# Altium PCB 04-11376.PcbDoc (part 1 of 3)
Units mm, origin at the board's own origin, x right, y up, seen from the top; angles counter-clockwise.
Board outline 23 x 31.8 mm, 4 copper layers (Top Layer, GND, Power, Bottom Layer), stack 1.312 mm thick; 75 components, 46 nets, 201 pads, 132 vias.
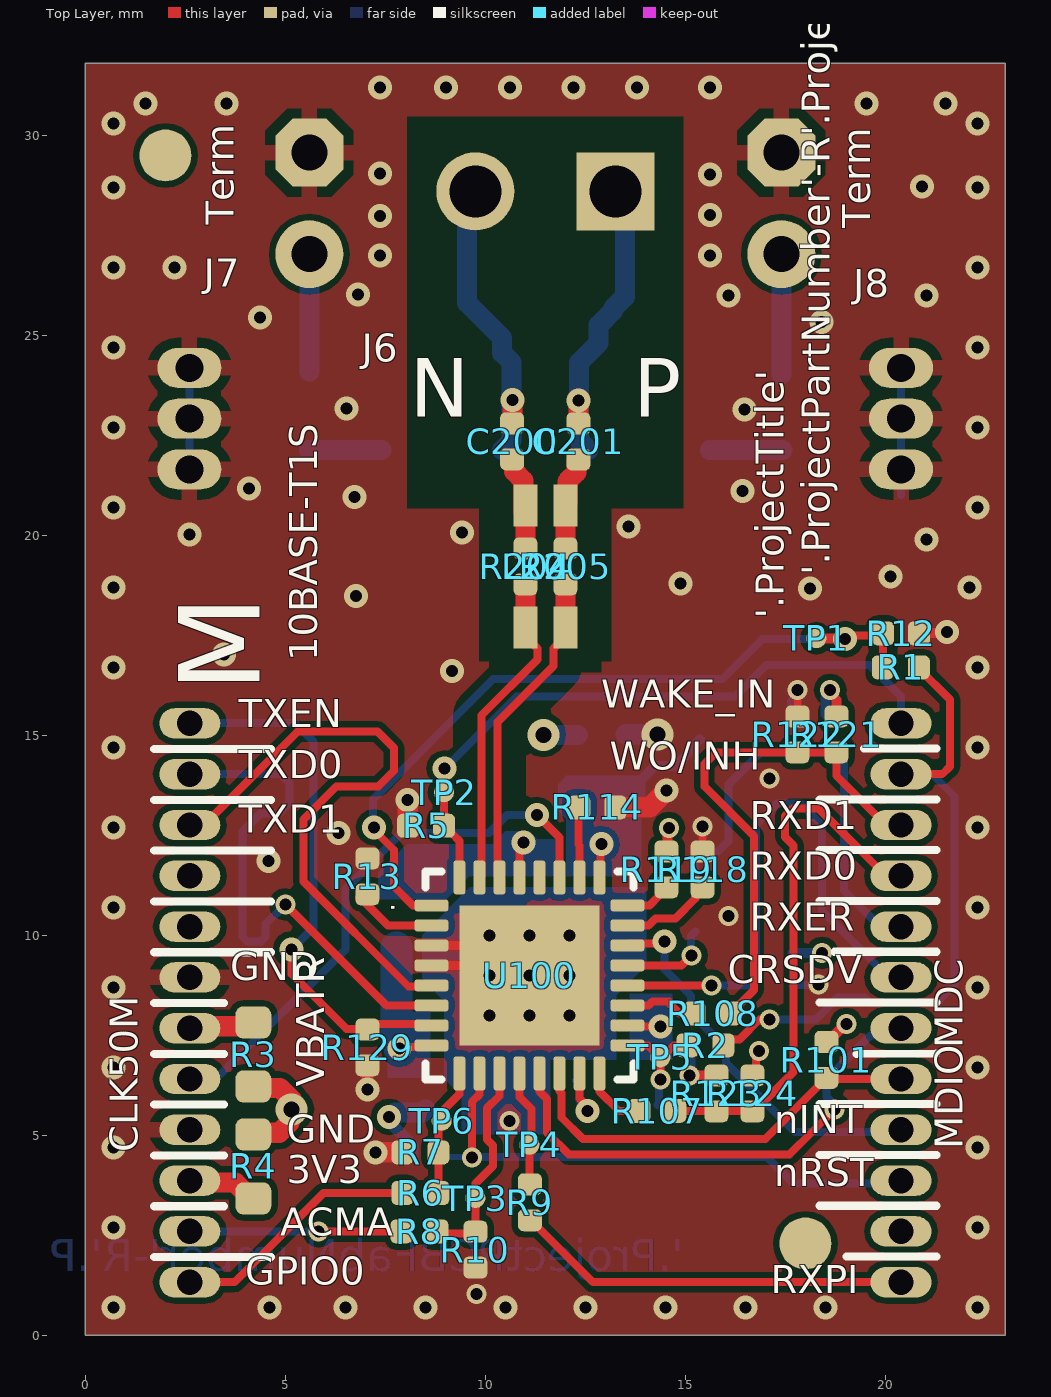
[diagram p0: Top Layer view]
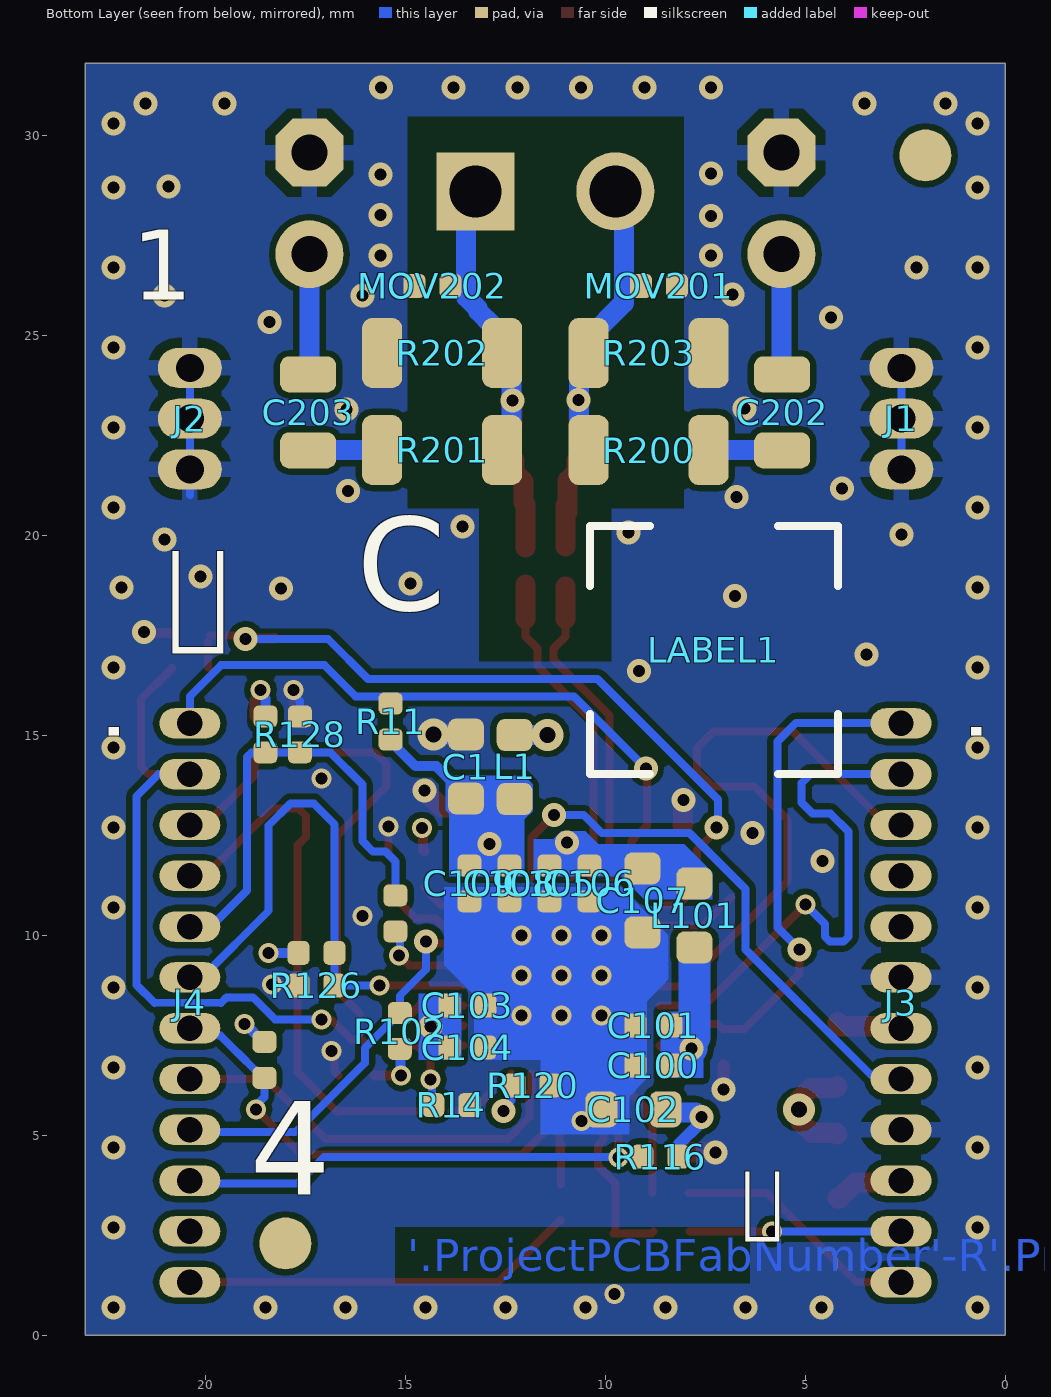
[diagram p1: Bottom Layer view, seen from below]
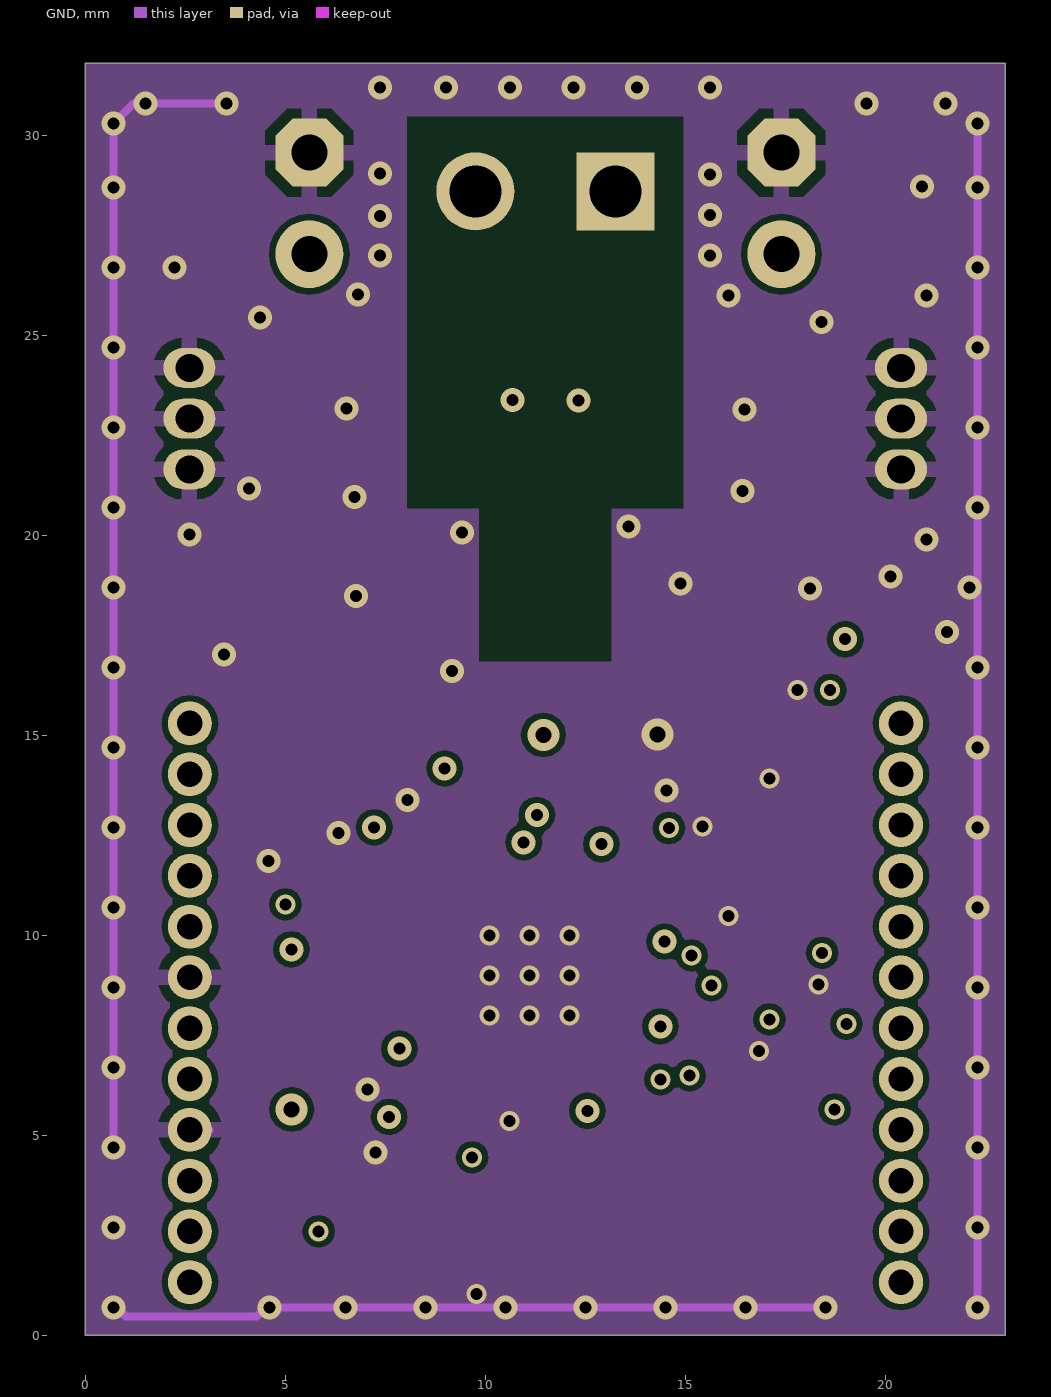
[diagram p2: GND]
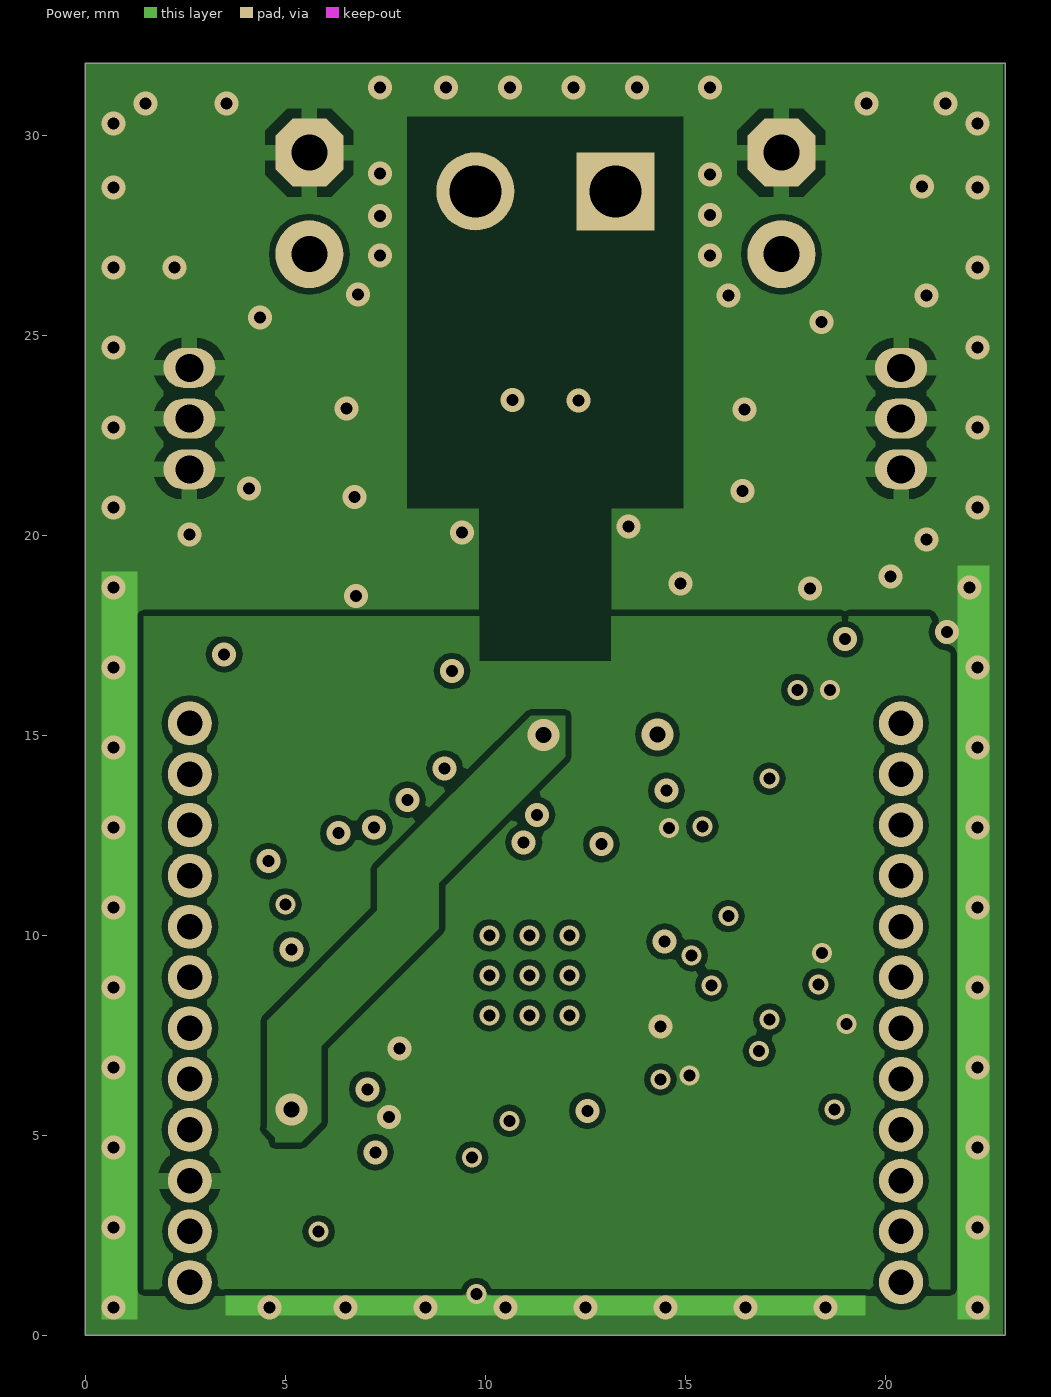
[diagram p3: Power]

## Layer stack, top to bottom
Top Layer: signal copper 0.018
Dielectric 1: prepreg 0.14, 2x1080, Dk 4.2
GND: signal copper 0.033
Dielectric 2: core 0.93, FR-4, Dk 4.2
Power: signal copper 0.033
Dielectric 3: prepreg 0.14, 2x1080, Dk 4.2
Bottom Layer: signal copper 0.018

## Board outline
0,0 0,31.8 23,31.8 23,0

## Design rules (kind name [scope] priority, off if disabled: settings)
BoardOutlineClearance [All] p1: gap=0 ignorepadtopadclearanceinfootprint=FALSE
Clearance "Text To Poly" [IsText vs IsRegion] p1 off: gap=-0.1 ignorepadtopadclearanceinfootprint=FALSE except(0: Arc-Hole Track-Hole SMDPad-Hole THPad-Hole Via-Hole Fill-Hole Poly-Hole Region-Hole Text-Hole)
Clearance "EMV 1mm" [InNetClass('EMV') vs (not InNetClass('EMV')) and (not OnLayer('Keep-Out Layer')       )] p2 off: gap=1 ignorepadtopadclearanceinfootprint=FALSE except(0: Arc-Hole Track-Hole SMDPad-Hole THPad-Hole Via-Hole Fill-Hole Poly-Hole Region-Hole Text-Hole)
Clearance "Switch zu Allem 1mm" [InNet('SWITCH') vs (IsRegion)] p3: gap=1 ignorepadtopadclearanceinfootprint=FALSE except(0: Arc-Hole Track-Hole SMDPad-Hole THPad-Hole Via-Hole Fill-Hole Poly-Hole Region-Hole Text-Hole)
Clearance "Diff to Polygon" [InDifferentialPairClass('All Differential Pairs') vs InPolygon] p4: gap=0.6 ignorepadtopadclearanceinfootprint=FALSE
Clearance "small Pads 0.2mm" [(IsTrack) or (InPadClass('All Pads')) vs HasFootprint('MSOP-8_P0.65_EP', 'VQFN-36_6x6_EP4.5x4.5')] p5: gap=0.2 ignorepadtopadclearanceinfootprint=FALSE except(0: Arc-Hole Track-Hole SMDPad-Hole THPad-Hole Via-Hole Fill-Hole Poly-Hole Region-Hole Text-Hole)
Clearance [All] p6: gap=0.15 ignorepadtopadclearanceinfootprint=FALSE except(0: Arc-Hole Track-Hole SMDPad-Hole THPad-Hole Via-Hole Fill-Hole Poly-Hole Region-Hole Text-Hole)
ComponentClearance "M1 J1 J2 J3 J4 J5 J6 J7 J8" [InComponent('M1','J1','J2','J3','J4','J5','J6','J7','J8') vs InComponent('M1','J1','J2','J3','J4','J5','J6','J7','J8')] p1: gap=-1 collisioncheckmode=3 verticalgap=0.254 showdistances=FALSE
ComponentClearance "D2 D3" [InComponent('D2','D3') vs InComponent('D2','D3')] p2: gap=-1 collisioncheckmode=3 verticalgap=0.254 showdistances=FALSE
ComponentClearance "C4 C12" [InComponent('C4','C12') vs InComponent('C4','C12')] p3: gap=-1 collisioncheckmode=3 verticalgap=0.254 showdistances=FALSE
ComponentClearance "C3 C8" [InComponent('C3','C8') vs InComponent('C3','C8')] p4: gap=-1 collisioncheckmode=3 verticalgap=0.254 showdistances=FALSE
ComponentClearance "D1 D11" [InComponent('D1','D11') vs InComponent('D1','D11')] p5: gap=-1 collisioncheckmode=3 verticalgap=0.254 showdistances=FALSE
ComponentClearance "D4 D10" [InComponent('D4','D10') vs InComponent('D4','D10')] p6: gap=-1 collisioncheckmode=3 verticalgap=0.254 showdistances=FALSE
ComponentClearance "C7 C8" [InComponent('C7','C8'     ) vs InComponent('C7','C8'  )] p7: gap=-1 collisioncheckmode=3 verticalgap=0.254 showdistances=FALSE
ComponentClearance "M1 CN200 CN201" [InComponent('M1','CN200','CN201') vs InComponent('M1','CN200','CN201')] p8: gap=-1 collisioncheckmode=3 verticalgap=0.254 showdistances=FALSE
ComponentClearance "M1 J200 J201" [InComponent('L200','R204','R205') vs InComponent('L200','R204','R205')] p9: gap=-1 collisioncheckmode=3 verticalgap=0.254 showdistances=FALSE
ComponentClearance [All] p10: gap=0.2 collisioncheckmode=3 verticalgap=0.2 showdistances=FALSE
DiffPairsRouting [All] p1: maxlimit=0.2 minlimit=0.2 mostfreqgap=0.2 toplayer_minwidth=0.2 toplayer_maxwidth=0.2 toplayer_prefwidth=0.2 midlayer1_minwidth=0.2 midlayer1_maxwidth=0.2 midlayer1_prefwidth=0.2 midlayer2_minwidth=0.2 midlayer2_maxwidth=0.2 midlayer2_prefwidth=0.2 bottomlayer_minwidth=0.2 bottomlayer_maxwidth=0.2 bottomlayer_prefwidth=0.2 maxuncoupledlength=12.7
FabricationTestPointUsage TestPointUsage [All] p1: valid=0 allowmultiple=FALSE
FabricationTestpoint Testpoint [All] p1: side=3 testpointundercomponent=TRUE minsize=1.016 maxsize=2.54 preferedsize=1.524 minholesize=0 maxholesize=1.016 preferedholesize=0.813 testpointgrid=0.025 allowsidetop=TRUE allowsidebottom=TRUE usegrid=TRUE gridtolerance=0
HoleSize [All] p1: absolutevalues=TRUE maxlimit=5 minlimit=0.3 maxpercent=80.000 minpercent=20.000
HoleToHoleClearance [All] p1: gap=0.3 allowstackedmicrovias=TRUE
MinimumSolderMaskSliver [All] p1 off: minsoldermaskwidth=0.17
PlaneClearance [All] p1: clearance=0.5
PlaneConnect [All] p1: planeconnectstyle=Relief reliefexpansion=0.5 reliefentries=4 reliefconductorwidth=0.3 reliefairgap=0.3
PolygonConnect PolygonConnect_0.7 [IsNamedPolygon('0.7mm') vs (InPadClass('All Pads'))] p1: connectstyle=Relief reliefconductorwidth=0.7 reliefentries=4 polygonreliefangle="90 Angle" airgapwidth=0.25
PolygonConnect PolygonConnect_full [All vs IsVia or IsSMTPin] p2: connectstyle=Direct reliefconductorwidth=0 reliefentries=4 polygonreliefangle="90 Angle" airgapwidth=0.254
PolygonConnect PolyConn3.2 [AsMM(HoleDiameter = 3.2)] p3: connectstyle=Direct reliefconductorwidth=0 reliefentries=4 polygonreliefangle="90 Angle" airgapwidth=0.254
PolygonConnect PolygonConnect_0.5 [IsNamedPolygon('0.5mm') vs (InPadClass('All Pads'))] p4: connectstyle=Relief reliefconductorwidth=0.5 reliefentries=4 polygonreliefangle="90 Angle" airgapwidth=0.25
PolygonConnect [All] p5: connectstyle=Relief reliefconductorwidth=0.4 reliefentries=4 polygonreliefangle="90 Angle" airgapwidth=0.25
RoutingVias [All] p1: holewidth=0.4 width=0.8 viastyle="Through Hole" minholewidth=0.3 minwidth=0.6 maxholewidth=1.6 maxwidth=2.5
SilkToSilkClearance [All] p1: silktosilkclearance=0.2
SilkToSolderMaskClearance SilkscreenOverComponentPads [IsPad] p1: minsilkscreentomaskgap=0.2 clearancetoexposedcopper=TRUE
SolderMaskExpansion [All] p1: expansion=0 istentingtop=FALSE
Width [All] p1: maxlimit=7 minlimit=0.15 preferedwidth=0.25 toplayer_minwidth=0.2 midlayer1_minwidth=0.2 midlayer2_minwidth=0.2 minimp=50.000000 maximp=50.000000 favimp=50.000000
19 further rules are at their usual default settings.

## Classes and differential pairs
net class Power: 3V3 VDDA VDDAU
net class "100 Ohm Diff": TRX_N TRX_P
component class "Phy Daughter Board Header": J1 J2 J3 J4 R1 R2 R3 R4
component class Mechanical: LABEL1 LABEL?
component class "LAN8670 Watson": C1 C100 C101 C102 C103 C104 C105 C106 C107 C108 C109 L1 L101 R5 R6 R7 R8 R9 R10 R11 R12 R13 R14 R100 R101 R102 R107 R108 R109 R114 R116 R118 R119 R120 R121 R122 R123 R124 R125 R126 R127 R128 R129 TP1 TP2 TP3 TP4 TP5 TP6 U100
component class BIN: C200 C201 C202 C203 J6 J7 J8 L200 MOV201 MOV202 R200 R201 R202 R203 R204 R205
differential pair TRX: +TRX_P -TRX_N

## Components (designator, comment, footprint, x,y, rotation, side; value= is the part's Value field where it differs from the comment)
C1 "Capacitor NP" CAP_C_0603 13.485,14.222 r270 bottom value=10uF
C100 "Capacitor NP" CAP_C_0402 8.8,6.75 r180 bottom value=10000pF
C101 "Capacitor NP" CAP_C_0402 8.8,7.75 r180 bottom value=0.1uF
C102 "Capacitor NP" CAP_C_0603 9.3,5.65 r180 bottom value=10uF
C103 "Capacitor NP" CAP_C_0402 13.45,8.25 r0 bottom value=10000pF
C104 "Capacitor NP" CAP_C_0402 13.45,7.2 r0 bottom value=0.1uF
C105 "Capacitor NP" CAP_C_0402 11.4,11.3 r90 bottom value=10000pF
C106 "Capacitor NP" CAP_C_0402 10.4,11.3 r90 bottom value=0.1uF
C107 "Capacitor NP" CAP_C_0603 9.075,10.875 r90 bottom value=10uF
C108 "Capacitor NP" CAP_C_0402 12.4,11.3 r90 bottom value=10000pF
C109 "Capacitor NP" CAP_C_0402 13.4,11.3 r90 bottom value=0.1uF
C200 "Capacitor NP" CAP_C_0402 10.668,22.352 r90 top value=0.1uF
C201 "Capacitor NP" CAP_C_0402 12.325,22.348 r90 top value=0.1uF
C202 "Capacitor NP" CAP_C_0805 5.581,23.076 r270 bottom value=0.22uF
C203 "Capacitor NP" CAP_C_0805 17.432,23.076 r270 bottom value=0.22uF
J1 "Header 1x3" HDR_M_1.27_1x3_TMS_103-02_L_S 2.6,22.92 r270 bottom
J2 "Header 1x3" HDR_M_1.27_1x3_TMS_103-02_L_S 20.39,22.92 r270 bottom
J3 "Header 1x12" HDR_M_1.27_1x12 2.61,8.315 r270 bottom
J4 "Header 1x12" HDR_M_1.27_1x12 20.39,8.315 r270 bottom
J6 "Header 1x2" CON_TB_3.5mm_2POS_WE_WR-TBL-691214110002S 11.5,28.3 r180 top locked value="TERMINAL 1x2"
J7 "Header 1x2" HDR_M_2.54_1x2 5.6,28.3 r270 top value="HDR-2.54 Male 1x2"
J8 "Header 1x2" HDR_M_2.54_1x2 17.4,28.3 r270 top value="HDR-2.54 Male 1x2"
L1 "Ferrite Bead" IND_C_0603 12.267,14.21 r90 bottom value=300R
L101 "Ferrite Bead" IND_C_0603 7.775,10.5 r270 bottom value=300R
L200 "Inductor Choke ACT1210" IND_TDK_ACT1210D_L3.9W2.5H2.5 11.5,19.225 r90 top value=130µH@100kHz
LABEL1 "08-10021" 08-10021 7.289,17.132 r90 bottom value="PCBA LABEL 6X6mm"
MOV201 "Varistor" RES_C_0402 8.661,26.238 r0 bottom value=220V
MOV202 "Varistor" RES_C_0402 14.326,26.238 r180 bottom value=220V
R1 "Resistor" RES_C_0402 20.385,16.7 r180 top value=0R
R2 "Resistor" RES_C_0402 15.499,7.25 r180 top value=0R
R3 "Resistor" RES_C_0603 4.198,7.025 r90 top value=0R
R4 "Resistor" RES_C_0603 4.198,4.225 r90 top value=0R
R5 "Resistor" RES_C_0402 8.517,12.742 r0 top value=10k
R6 "Resistor" RES_C_0402 8.376,3.561 r0 top value=0R
R7 "Resistor" RES_C_0402 8.376,4.576 r0 top value=10k
R8 "" RES_C_0402 8.35,2.6 r0 top value=0R
R9 "Resistor" RES_C_0402 11.113,3.329 r90 top value=0R
R10 "Resistor" RES_C_0402 9.75,2.144 r90 top value=10k
R11 "Resistor" RES_C_0402 15.371,15.347 r90 bottom value=10k
R12 "Resistor" RES_C_0402 20.39,17.55 r180 top value=10k
R13 "Resistor" RES_C_0402 7.05,11.475 r270 top value=10k
R14 "Resistor" RES_C_0402 13.853,5.758 r0 bottom value=10k
R100 "Resistor" RES_C_0402 18.525,6.89 r90 bottom value=4.7k
R101 "Resistor" RES_C_0402 18.525,6.89 r90 top value=4.7k
R102 "Resistor" RES_C_0402 15.14,7.61 r270 bottom value=4.7k
R107 "Resistor" RES_C_0402 14.3,5.615 r180 top value=22R
R108 "Resistor" RES_C_0402 15.681,8.05 r180 top value=22R
R109 "Resistor" RES_C_0402 15.25,10.55 r270 bottom value=22R
R114 "Resistor" RES_C_0402 12.8,13.2 r180 top value=12.4k
R116 "Resistor" RES_C_0402 8.625,4.468 r180 bottom value=10k
R118 "Resistor" RES_C_0402 15.43,11.65 r90 top value=10k
R119 "Resistor" RES_C_0402 14.525,11.65 r90 top value=10k
R120 "Resistor" RES_C_0402 11.817,6.25 r180 bottom value=10k
R121 "Resistor" RES_C_0402 18.775,15.025 r90 top value=10k
R122 "Resistor" RES_C_0402 17.8,15.025 r90 top value=10k
R123 "Resistor" RES_C_0402 15.775,6.05 r90 top value=10k
R124 "Resistor" RES_C_0402 16.675,6.05 r90 top value=10k
R125 "Resistor" RES_C_0402 17.224,9.562 r0 bottom value=10k
R126 "Resistor" RES_C_0402 17.224,8.75 r0 bottom value=10k
R127 "Resistor" RES_C_0402 18.5,15.025 r90 bottom value=10k
R128 "Resistor" RES_C_0402 17.638,15.025 r90 bottom value=10k
R129 "Resistor" RES_C_0402 7.05,7.2 r90 top value=10k
R200 "Resistor" RES_C_1206 8.919,22.135 r0 bottom value=49.9R
R201 "Resistor" RES_C_1206 14.081,22.135 r180 bottom value=49.9R
R202 "Resistor" RES_C_1206 14.081,24.561 r0 bottom value=10k
R203 "Resistor" RES_C_1206 8.919,24.561 r180 bottom value=10k
R204 "Resistor" RES_C_0402 11,19.225 r90 top value=0R
R205 "Resistor" RES_C_0402 12,19.225 r90 top value=0R
TP1 "Test Point No BOM" TP_rd_0.5mm 18.273,17.429 r90 top value="TP PAD RD 0.5mm SMD"
TP2 "Test Point No BOM" TP_rd_0.5mm 8.965,13.578 r90 top value="TP PAD RD 0.5mm SMD"
TP3 "Test Point No BOM" TP_rd_0.5mm 9.75,3.434 r90 top value="TP PAD RD 0.5mm SMD"
TP4 "Test Point No BOM" TP_rd_0.5mm 11.1,4.765 r90 top value="TP PAD RD 0.5mm SMD"
TP5 "Test Point No BOM" TP_rd_0.5mm 14.375,6.95 r90 top value="TP PAD RD 0.5mm SMD"
TP6 "Test Point No BOM" TP_rd_0.5mm 8.905,5.365 r90 top value="TP PAD RD 0.5mm SMD"
U100 "LAN8670_C VQFN-32" VQFN-32_5x5_EP3.5X3.5 11.1,9 r0 top value=LAN8670C2

## Footprints (in the part's own frame and the unit in brackets; to place one, negate y for a bottom-side part, rotate by r counter-clockwise, add the part's x,y. Pads: shape width x height; smd on the part's side, far side on the other; paste and mask are expansions set on the pad)
08-10021 [mm]
  silkscreen extent -3.1,-3.1 3.1,3.1, body extent -3,-3 3,3, height 0.1
CAP_C_0402 [mm] "Chip Capacitor, 2-Leads, Body 1.0x0.5mm, IPC High Density"
  rrect50% 0.55x0.6 smd: 1(-0.45,0) 2(0.45,0)
  body extent -0.5,-0.3 0.5,0.3, height 0.2
CAP_C_0603 [mm] "Chip Capacitor, 2-Leads, Body 1.6x0.8mm, IPC Medium Density"
  rrect50% 0.8x0.9 smd: 1(-0.8,0) 2(0.8,0)
  body extent -0.8,-0.4 0.8,0.4, height 0.65
CAP_C_0805 [mm] "Chip Capacitor, 2-Leads, Body 2.0x1.3mm, IPC Medium Density"
  rrect50% 0.9x1.4 smd: 1(-0.95,0) 2(0.95,0)
  body extent -1,-0.62 1,0.63, height 0.78
CON_TB_3.5mm_2POS_WE_WR-TBL-691214110002S [mm]
  rect 1.95x1.95 hole 1.3: 1(-1.75,-0.3)
  round 1.95 hole 1.3: 2(1.75,-0.3)
  body extent -3.5,-3.65 4.1,3.65, height 9.15
HDR_M_1.27_1x3_TMS_103-02_L_S [mm] "Header Male Vertical 3 Way 1.27mm Pitch"
  oval 1x1.6 / inner oval 1x1.3 / far side oval 1x1.6 hole 0.7: 1(-1.27,0) 2(0,0) 3(1.27,0)
  body extent -1.9,-1.22 1.91,1.22, height 5.08
HDR_M_1.27_1x12 [mil] "Header Male Vertical 12 Way 1.27mm Pitch"
  oval 30x60 / inner round 43.31 / far side oval 30x60 hole 25: 1(-275,0) 2(-225,0) 3(-175,0) 4(-125,0) 5(-75,0) 6(-25,0) 7(25,0) 8(75,0) 9(125,0) 10(175,0) 11(225,0) 12(275,0)
  body extent -300,-48 300,48, height 200
HDR_M_2.54_1x2 [mm] "Header Male Vertical 4 Way 2.54mm Pitch"
  oct 1.7x1.7 hole 0.9: 1(-1.27,0)
  round 1.7 hole 0.9: 2(1.27,0)
  body extent -2.54,-1.27 2.54,1.27, height 5.94
IND_C_0603 [mm] "Chip Inductor, 2-Leads, Body 1.6x0.8mm, IPC Medium Density"
  rrect50% 0.8x0.9 smd: 1(-0.8,0) 2(0.8,0)
  body extent -0.8,-0.4 0.8,0.4, height 0.95
IND_TDK_ACT1210D_L3.9W2.5H2.5 [mm] "CMC TDK ACT1210D"
  rect 1.05x0.6 smd: 1(-1.525,0.5) 2(-1.525,-0.5) 3(1.525,-0.5) 4(1.525,0.5)
  body extent -1.95,-1.25 1.95,1.25, height 2.5
RES_C_0402 [mm] "Chip Resistor, 2-Leads, Body 1.0x0.5mm, IPC Medium Density"
  rrect50% 0.55x0.6 smd: 1(-0.45,0) 2(0.45,0)
  body extent -0.5,-0.3 0.5,0.3, height 0.2
RES_C_0603 [mm] "Chip Resistor, 2-Leads, Body 1.6x0.8mm, IPC Medium Density"
  rrect50% 0.8x0.9 smd: 1(-0.8,0) 2(0.8,0)
  body extent -0.8,-0.4 0.8,0.4, height 0.3
RES_C_1206 [mm] "Chip Resistor, 2-Leads, Body 3.2x1.6mm, IPC Medium Density"
  rrect50% 1x1.75 smd: 1(-1.5,0) 2(1.5,0)
  body extent -1.6,-0.8 1.6,0.8, height 1
TP_rd_0.5mm [mm] "Test Point round 0.5mm"
  round 0.5 smd paste-0.5 mask+0: 1(0,0)
VQFN-32_5x5_EP3.5X3.5 [mm] "32-Lead Ultra Thin Plastic Quad Flat, No Lead Package, 5x5 Body w/3.4 Exposed Pad"
  rrect50% 0.85x0.3 smd: 1(-2.45,1.75) 2(-2.45,1.25) 3(-2.45,0.75) 4(-2.45,0.25) 5(-2.45,-0.25) 6(-2.45,-0.75) 7(-2.45,-1.25) 8(-2.45,-1.75) 17(2.45,-1.75) 18(2.45,-1.25) 19(2.45,-0.75) 20(2.45,-0.25) 21(2.45,0.25) 22(2.45,0.75) 23(2.45,1.25) 24(2.45,1.75)
  rrect50% 0.3x0.85 smd: 9(-1.75,-2.45) 10(-1.25,-2.45) 11(-0.75,-2.45) 12(-0.25,-2.45) 13(0.25,-2.45) 14(0.75,-2.45) 15(1.25,-2.45) 16(1.75,-2.45) 25(1.75,2.45) 26(1.25,2.45) 27(0.75,2.45) 28(0.25,2.45) 29(-0.25,2.45) 30(-0.75,2.45) 31(-1.25,2.45) 32(-1.75,2.45)
  rect 3.5x3.5 smd: 33(0,0)
  silkscreen extent -2.6,-2.6 2.6,2.6, body extent -2.52,-2.52 2.52,2.52, height 0.83

## Part data
C1: library part CAP0542, Manufacturer 1=Samsung, Manufacturer 2="TDK Corporation", Manufacturer 3=Panasonic, Manufacturer Part Number 1=CL10A106MP8NNNC, Manufacturer Part Number 2=C1608X5R1A106M, Manufacturer Part Number 3=ECJ-1VB1A106M, Operating Temperature="-55C to +85C", Package=0603, Supplier Part Number 1=1276-1871-1-ND, Temperature Coefficient=X5R, Tolerance=20%, Voltage=10V, Category=Capacitor, ComponentLink1Description="SVN Datasheet", ComponentLink1URL=https://chn-vm-apps.microchip.com/mchprepo/parts/Datasheets/ECJ__General_.pdf, ComponentLink2Description="Local Datasheet", ComponentLink2URL=C:\ALTIUM_WORK\00001_MCHP-CDB\Datasheets\ECJ__General_.pdf, ComponentLink3Description="Open Symbol", ComponentLink3URL="C:\ALTIUM_WORK\00001_MCHP-CDB\Library\LibraryRefs\Capacitor NP.SchLib", ComponentLink4Description="Open Footprint", ComponentLink4URL=C:\ALTIUM_WORK\00001_MCHP-CDB\Library\Footprints\CAP_C_0603.PcbLib, ComponentLink5Description="Open Footprint 2", ComponentLink6Description="Open Footprint 3", ComponentLink7Description="Open Footprint 4", Description_="CAP CER 10uF 10V 20% X5R SMD 0603", Dev Tools Status=Production, MCHP-ID=CAP0542, Populated=Yes, Quantity Override=1, Revision=2, Status="MCL Design", Supplier 1=Digi-Key, Supplier 2=Digi-Key, Supplier 3=Digi-Key, Supplier Part Number 2=445-6853-1-ND, Supplier Part Number 3=PCC2479CT-ND, Symbol="Capacitor NP", Type=Ceramic
C100 C103 C105 C108: library part CAP2026, Manufacturer 1="Murata Electronics North America", Manufacturer 2="TDK Corporation", Manufacturer Part Number 1=GCM155R71H103KA55D, Manufacturer Part Number 2=CGA2B3X7R1H103K050BB, Operating Temperature="-55C to +125C", Package=0402, Supplier Part Number 1=490-4762-1-ND, Temperature Coeffcient=X7R, Tolerance=10%, Voltage=50V, Category=Capacitor, ComponentLink1Description="SVN Datasheet", ComponentLink1URL=https://chn-vm-apps.microchip.com/mchprepo/parts/Datasheets/mlcc_automotive_general_en.pdf, ComponentLink2Description="Local Datasheet", ComponentLink2URL=C:\ALTIUM_WORK\00001_MCHP-CDB\Datasheets\mlcc_automotive_general_en.pdf, ComponentLink3Description="Open Symbol", ComponentLink3URL="C:\ALTIUM_WORK\00001_MCHP-CDB\Library\LibraryRefs\Capacitor NP.SchLib", ComponentLink4Description="Open Footprint", ComponentLink4URL=C:\ALTIUM_WORK\00001_MCHP-CDB\Library\Footprints\CAP_C_0402.PcbLib, ComponentLink5Description="Open Footprint 2", ComponentLink6Description="Open Footprint 3", ComponentLink7Description="Open Footprint 4", Description_="CAP CER 10000pF 50V 10% X7R SMD 0402 AEC-Q200", Dev Tools Status=Production, MCHP-ID=CAP2026, Owner="Gabor Bihari", Populated=YES, Quantity Override=1, Revision=1, Status="MCL Design", Supplier 1=Digi-Key, Supplier 2=Digi-Key, Supplier Part Number 2=445-6893-1-ND, Symbol="Capacitor NP", Type=Ceramic
C101 C104 C106 C109: library part CAP1033, "Capacitor", Manufacturer 1=Murata, Manufacturer Part Number 1=GRM155R71C104KA88D, Operating Temperature="-55C to +125C", Package=0402, Supplier Part Number 1=490-3261-2-ND, Temperature Coeffcient=X7R, Tolerance=10%, Voltage=16V, Category=Capacitor, ComponentLink1Description=Datasheet, ComponentLink1URL=https://chn-vm-apps.microchip.com/mchprepo/parts/Datasheets/L0005E.pdf, Description_="CAP CER 0.1uF 16V 10% X7R SMD 0402", MCHP-ID=CAP1033, Owner="Sompoch Loboonlert", Populated=Yes, Quantity Override=1, Revision=2, Status=Production, Supplier 1=Digi-Key, Type=Ceramic
C102 C107: library part CAP0542, "Capacitor", Manufacturer 1=Samsung, Manufacturer 2="TDK Corporation", Manufacturer 3=Panasonic, Manufacturer Part Number 1=CL10A106MP8NNNC, Manufacturer Part Number 2=C1608X5R1A106M, Manufacturer Part Number 3=ECJ-1VB1A106M, Operating Temperature="-55C to +85C", Package=0603, Supplier Part Number 1=1276-1871-1-ND, Temperature Coeffcient=X5R, Tolerance=20%, Voltage=10V, Category=Capacitor, ComponentLink1Description="SVN Datasheet", ComponentLink1URL=https://chn-vm-apps.microchip.com/mchprepo/parts/Datasheets/ECJ__General_.pdf, ComponentLink2Description="Local Datasheet", ComponentLink2URL=C:\ALTIUM_WORK\00001_MCHP-CDB\Datasheets\ECJ__General_.pdf, ComponentLink3Description="Open Symbol", ComponentLink3URL="C:\ALTIUM_WORK\00001_MCHP-CDB\Library\LibraryRefs\Capacitor NP.SchLib", ComponentLink4Description="Open Footprint", ComponentLink4URL=C:\ALTIUM_WORK\00001_MCHP-CDB\Library\Footprints\CAP_C_0603.PcbLib, ComponentLink5Description="Open Footprint 2", ComponentLink6Description="Open Footprint 3", ComponentLink7Description="Open Footprint 4", Description_="CAP CER 10uF 10V 20% X5R SMD 0603", Dev Tools Status=Production, MCHP-ID=CAP0542, Populated=Yes, Quantity Override=1, Revision=2, Status="MCL Design", Supplier 1=Digi-Key, Supplier 2=Digi-Key, Supplier 3=Digi-Key, Supplier Part Number 2=445-6853-1-ND, Supplier Part Number 3=PCC2479CT-ND, Symbol="Capacitor NP", Type=Ceramic
C200 C201: library part CAP2375, Manufacturer 1="Murata Electronics", Manufacturer Part Number 1=GRM155R71H104KE14J, Operating Temperature="-55C to +125C", Package=0402, Supplier Part Number 1=81-GRM155R71H104KE4J, Temperature Coeffcient=X7R, Tolerance=10%, Voltage=50V, Category=Capacitor, ComponentLink1Description="SVN Datasheet", ComponentLink1URL=https://chn-vm-apps.microchip.com/mchprepo/parts/Datasheets/murata_03052018_GRM_Series_1-1310166.pdf, ComponentLink2Description="Local Datasheet", ComponentLink2URL=C:\ALTIUM_WORK\00001_MCHP-CDB\Datasheets\murata_03052018_GRM_Series_1-1310166.pdf, ComponentLink3Description="Open Symbol", ComponentLink3URL="C:\ALTIUM_WORK\00001_MCHP-CDB\Library\LibraryRefs\Capacitor NP.SchLib", ComponentLink4Description="Open Footprint", ComponentLink4URL=C:\ALTIUM_WORK\00001_MCHP-CDB\Library\Footprints\CAP_C_0402.PcbLib, ComponentLink5Description="Open Footprint 2", ComponentLink6Description="Open Footprint 3", ComponentLink7Description="Open Footprint 4", Description_="Ceramic capacitor, SMD 0402, X7R, 50V, +/-10%", Dev Tools Status=Production, MCHP-ID=CAP2375, Owner="Dragos Danaila", Populated=YES, Quantity Override=1, Revision=1, Status="MCL Design", Supplier 1="Mouser Electronics", Symbol="Capacitor NP", Type=Ceramic
C202 C203: library part CAP2522, Manufacturer 1="AVX Corporation", Manufacturer Part Number 1=08051C224K4T2A, Operating Temperature="-55°C to +125°C", Package=0805, Supplier Part Number 1=478-13049-1-ND, Temperature Coeffcient=X7R, Tolerance=±10%, Voltage=100V, Category=Capacitor, ComponentLink1Description="SVN Datasheet", ComponentLink1URL=https://chn-vm-apps.microchip.com/mchprepo/parts/Datasheets/AVX_08051C224K4T2A, ComponentLink2Description="Local Datasheet", ComponentLink2URL=C:\ALTIUM_WORK\00001_MCHP-CDB\Datasheets\AVX_08051C224K4T2A, ComponentLink3Description="Open Symbol", ComponentLink3URL="C:\ALTIUM_WORK\00001_MCHP-CDB\Library\LibraryRefs\Capacitor NP.SchLib", ComponentLink4Description="Open Footprint", ComponentLink4URL=C:\ALTIUM_WORK\00001_MCHP-CDB\Library\Footprints\CAP_C_0805.PcbLib, ComponentLink5Description="Open Footprint 2", ComponentLink6Description="Open Footprint 3", ComponentLink7Description="Open Footprint 4", Description_="CAP CER 0.22uF 100V 10% X7R SMD 0805 AEC-Q200", Dev Tools Status=Design, MCHP-ID=CAP2522, Owner="Lori Graham", Populated=YES, Quantity Override=1, Revision=1, Status="MCL Design", Supplier 1=Digi-Key, Symbol="Capacitor NP", Type=Ceramic
J1 J2: library part CON1213, Manufacturer 1=Samtec, Manufacturer Part Number 1=TMS-103-02-L-S, Category=Connector, ComponentLink1Description="SVN Datasheet", ComponentLink2Description="Local Datasheet", ComponentLink3Description="Open Symbol", ComponentLink3URL="C:\ALTIUM_WORK\00001_MCHP-CDB\Library\LibraryRefs\Header 1X3.SchLib", ComponentLink4Description="Open Footprint", ComponentLink4URL=C:\ALTIUM_WORK\00001_MCHP-CDB\Library\Footprints\HDR_M_1.27_1x3_TMS_103-02_L_S.PcbLib, ComponentLink5Description="Open Footprint 2", ComponentLink6Description="Open Footprint 3", ComponentLink7Description="Open Footprint 4", Description_="CON HDR-1.27 Male 1X3 TH VERT", Dev Tools Status=Production, MCHP-ID=CON1213, Owner="Leah Whitaker", Populated=YES, Quantity Override=1, Revision=0, Status="MCL Design", Supplier 1=Samtec, Supplier Part Number 1=TMS-103-02-L-S, Symbol="Header 1X3", Type="Header 1.27mm"
J3 J4: library part CON1212, Manufacturer 1=Samtec, Manufacturer Part Number 1=TMS-112-02-L-S, Category=Connector, ComponentLink1Description="SVN Datasheet", ComponentLink2Description="Local Datasheet", ComponentLink3Description="Open Symbol", ComponentLink3URL="C:\ALTIUM_WORK\00001_MCHP-CDB\Library\LibraryRefs\Header 1X12.SchLib", ComponentLink4Description="Open Footprint", ComponentLink4URL=C:\ALTIUM_WORK\00001_MCHP-CDB\Library\Footprints\HDR_M_1.27_1x12.PcbLib, ComponentLink5Description="Open Footprint 2", ComponentLink6Description="Open Footprint 3", ComponentLink7Description="Open Footprint 4", Description_="CON HDR-1.27 Male 1X12 TH VERT", Dev Tools Status=Production, MCHP-ID=CON1212, Owner="Leah Whitaker", Populated=YES, Quantity Override=1, Revision=0, Status="MCL Design", Supplier 1=Samtec, Supplier Part Number 1=TMS-112-02-L-S, Symbol="Header 1X12", Type="Header 1.27mm"
J6: library part CON2397, Current=10A, Manufacturer 1="WUERTH ELEKTRONIK", Manufacturer Part Number 1=691214110002S, Operating Temperature="-30C to +120C", Supplier Part Number 1=732-691214110002S-ND, Voltage=300V, Category=Connector, ComponentLink1Description="SVN Datasheet", ComponentLink1URL=https://chn-vm-apps.microchip.com/mchprepo/parts/Datasheets/6912141100xxS.pdf, ComponentLink2Description="Local Datasheet", ComponentLink2URL=C:\ALTIUM_WORK\00001_MCHP-CDB\Datasheets\6912141100xxS.pdf, ComponentLink3Description="Open Symbol", ComponentLink3URL="C:\ALTIUM_WORK\00001_MCHP-CDB\Library\LibraryRefs\Header 1x2.SchLib", ComponentLink4Description="Open Footprint", ComponentLink4URL=C:\ALTIUM_WORK\00001_MCHP-CDB\Library\Footprints\CON_TB_3.5mm_2POS_WE_WR-TBL-691214110002S.PcbLib, ComponentLink5Description="Open Footprint 2", ComponentLink6Description="Open Footprint 3", ComponentLink7Description="Open Footprint 4", Description_="CON TERMINAL 3.5mm 1x2 Female 16-30AWG 10A TH R/A", Dev Tools Status=Design, MCHP-ID=CON2397, Owner="Lori Graham", Populated=YES, Quantity Override=1, Revision=1, Status="MCL Design", Supplier 1=Digi-Key, Symbol="Header 1x2", Type="Terminal Block"
J7 J8: library part CON2326, Manufacturer 1="Samtec Inc", Manufacturer Part Number 1=TSW-102-23-F-S, Operating Temperature="-55°C ~ 125°C", Supplier Part Number 1=SAM10326-ND, Category=Connector, ComponentLink1Description="SVN Datasheet", ComponentLink1URL=https://chn-vm-apps.microchip.com/mchprepo/parts/Datasheets/Samtec_TSW_102-23-F-S, ComponentLink2Description="Local Datasheet", ComponentLink2URL=C:\ALTIUM_WORK\00001_MCHP-CDB\Datasheets\Samtec_TSW_102-23-F-S, ComponentLink3Description="Open Symbol", ComponentLink3URL="C:\ALTIUM_WORK\00001_MCHP-CDB\Library\LibraryRefs\Header 1x2.SchLib", ComponentLink4Description="Open Footprint", ComponentLink4URL=C:\ALTIUM_WORK\00001_MCHP-CDB\Library\Footprints\HDR_M_2.54_1x2.PcbLib, ComponentLink5Description="Open Footprint 2", ComponentLink6Description="Open Footprint 3", ComponentLink7Description="Open Footprint 4", Description_="CON HDR-2.54 M 1x2 5.84MH TH VERT", Dev Tools Status=Design, MCHP-ID=CON2326, Owner="Lori Graham", Populated=YES, Quantity Override=1, Revision=1, Status="MCL Design", Supplier 1=Digi-Key, Symbol="Header 1x2", Type="Header 2.54mm"
L1 L101: library part IND1886, Manufacturer 1="WURTH ELEKTRONIK", Manufacturer Part Number 1=742792640, Operating Temperature="-55°C ~ 125°C", Package=0603, RMS Current=300mA, Supplier Part Number 1=732-1578-1-ND, Test Frequency="100 MHz", Category=Inductor, ComponentLink1Description="SVN Datasheet", ComponentLink1URL=https://chn-vm-apps.microchip.com/mchprepo/parts/Datasheets/Wurth_742792640, ComponentLink2Description="Local Datasheet", ComponentLink2URL=C:\ALTIUM_WORK\00001_MCHP-CDB\Datasheets\Wurth_742792640, ComponentLink3Description="Open Symbol", ComponentLink3URL="C:\ALTIUM_WORK\00001_MCHP-CDB\Library\LibraryRefs\Ferrite Bead.SchLib", ComponentLink4Description="Open Footprint", ComponentLink4URL=C:\ALTIUM_WORK\00001_MCHP-CDB\Library\Footprints\IND_C_0603.PcbLib, ComponentLink5Description="Open Footprint 2", ComponentLink6Description="Open Footprint 3", ComponentLink7Description="Open Footprint 4", DCR=350mOhm, Description_="FERRITE BEAD 300Ohms@100MHz 300mA SMD 0603", Dev Tools Status=Design, MCHP-ID=IND1886, Owner="Lori Graham", Populated=YES, Quantity Override=1, Revision=1, Status="MCL Design", Supplier 1=Digi-Key, Symbol="Ferrite Bead", Type="Ferrite Bead"
L200: library part IND1953, Manufacturer 1="TDK Corporation", Manufacturer Part Number 1=ACT1210D-131-2P-TL00, Operating Temperature="-40°C ~ 150°C", Package=1210, Test Frequency=10MHz, BOM Notes="Alternate:  ACT1210D-101-2P-TL00 or ACT1210R-101-2P-TL00", Category=Inductor, ComponentLink1Description="SVN Datasheet", ComponentLink1URL=https://chn-vm-apps.microchip.com/mchprepo/parts/Datasheets/cmf_automotive_signal_act1210d_en.pdf, ComponentLink2Description="Local Datasheet", ComponentLink2URL=C:\ALTIUM_WORK\00001_MCHP-CDB\Datasheets\cmf_automotive_signal_act1210d_en.pdf, ComponentLink3Description="Open Symbol", ComponentLink3URL="C:\ALTIUM_WORK\00001_MCHP-CDB\Library\LibraryRefs\Inductor Choke ACT1210.SchLib", ComponentLink4Description="Open Footprint", ComponentLink4URL=C:\ALTIUM_WORK\00001_MCHP-CDB\Library\Footprints\IND_TDK_ACT1210D_L3.9W2.5H2.5.PcbLib, ComponentLink5Description="Open Footprint 2", ComponentLink6Description="Open Footprint 3", ComponentLink7Description="Open Footprint 4", DCR=3.5R, Description_="CM CHOKE 6.7k@10MHz 3.5R SMD 1210 AEC-Q200", Dev Tools Status=Design, MCHP-ID=IND1953, Owner="Joerg Buehrer", Populated=YES, Quantity Override=1, Revision=2, Status="MCL Design", Supplier 1="TDK Corporation", Supplier Part Number 1=ACT1210D-131-2P-TL00, Symbol="Inductor Choke ACT1210", Type="CM Choke"
MOV201 MOV202: library part RES2490, Current=1A, Manufacturer 1="TDK Corporation", Manufacturer Part Number 1=AVRH10C221KT1R5YA8, Operating Temperature="-55°C ~ 150°C", Package=0402, Supplier Part Number 1=445-AVRH10C221KT1R5YA8CT-ND, Voltage=220V, Category=Resistor, ComponentLink1Description="SVN Datasheet", ComponentLink1URL=https://chn-vm-apps.microchip.com/mchprepo/parts/Datasheets/vpd_automotive_varistors_avr_en.pdf, ComponentLink2Description="Local Datasheet", ComponentLink2URL=C:\ALTIUM_WORK\00001_MCHP-CDB\Datasheets\vpd_automotive_varistors_avr_en.pdf, ComponentLink3Description="Open Symbol", ComponentLink3URL=C:\ALTIUM_WORK\00001_MCHP-CDB\Library\LibraryRefs\Varistor.SchLib, ComponentLink4Description="Open Footprint", ComponentLink4URL=C:\ALTIUM_WORK\00001_MCHP-CDB\Library\Footprints\RES_C_0402.PcbLib, ComponentLink5Description="Open Footprint 2", ComponentLink6Description="Open Footprint 3", ComponentLink7Description="Open Footprint 4", Composition=C, Description_="RES VARISTOR C 220V 0.01J SMD 0402", Dev Tools Status=Design, MCHP-ID=RES2490, Owner="Sam Charles", Populated=YES, Quantity Override=1, Revision=1, Status="MCL Design", Supplier 1=Digi-Key, Symbol=Varistor, Type=Varistor
R1 R2 R6 R9 R204 R205: library part RSMT1246, Current=1A, Manufacturer 1="Panasonic Electronic Components", Manufacturer Part Number 1=ERJ-2GE0R00X, Operating Temperature="-55C to +155C", Package=0402, Power=1/10W, Supplier Part Number 1=P0.0JCT-ND, Tolerance=50mOhm, Voltage=50V, Category=Resistor, ComponentLink1Description="SVN Datasheet", ComponentLink1URL=https://chn-vm-apps.microchip.com/mchprepo/parts/Datasheets/DMA0000COL9.pdf, ComponentLink2Description="Local Datasheet", ComponentLink2URL=C:\ALTIUM_WORK\00001_MCHP-CDB\Datasheets\DMA0000COL9.pdf, ComponentLink3Description="Open Symbol", ComponentLink3URL=C:\ALTIUM_WORK\00001_MCHP-CDB\Library\LibraryRefs\Resistor.SchLib, ComponentLink4Description="Open Footprint", ComponentLink4URL=C:\ALTIUM_WORK\00001_MCHP-CDB\Library\Footprints\RES_C_0402.PcbLib, ComponentLink5Description="Open Footprint 2", ComponentLink6Description="Open Footprint 3", ComponentLink7Description="Open Footprint 4", Composition=TKF, Description_="RES TKF 0R 1/10W SMD 0402", MCHP-ID=RSMT1246, Owner="Dragos Danaila", Quantity Override=1, Status="MCL Design", Supplier 1=Digi-Key, Symbol=Resistor, Type="RES SMD"
  R1 R2 R6 R9: Dev Tools Status=Production, Populated=YES, Revision=1
  R204 R205: Dev Tools Status=Design, Populated=Yes, Revision=A
R3 R4: library part RES2360, Manufacturer 1="Panasonic Electronic Components", Manufacturer 2=Vishay, Manufacturer Part Number 1=ERJ-3GEY0R00V, Manufacturer Part Number 2=CRCW06030000Z0EB, Package=0603, Power=1/10W, Supplier Part Number 1=P0.0GCT-ND, Category=Resistor, Circuit Type=Isolated, ComponentLink1Description="SVN Datasheet", ComponentLink1URL=https://chn-vm-apps.microchip.com/mchprepo/parts/Datasheets/ERJ-3GEY0R00V.pdf, ComponentLink2Description="Local Datasheet", ComponentLink2URL=C:\ALTIUM_WORK\00001_MCHP-CDB\Datasheets\ERJ-3GEY0R00V.pdf, ComponentLink3Description="Open Symbol", ComponentLink3URL=C:\ALTIUM_WORK\00001_MCHP-CDB\Library\LibraryRefs\Resistor.SchLib, ComponentLink4Description="Open Footprint", ComponentLink4URL=C:\ALTIUM_WORK\00001_MCHP-CDB\Library\Footprints\RES_C_0603.PcbLib, ComponentLink5Description="Open Footprint 2", ComponentLink6Description="Open Footprint 3", ComponentLink7Description="Open Footprint 4", Composition=TKF, Description_="RES TKF 0R 1/10W SMD 0603 AEC-Q200", Dev Tools Status=Production, MCHP-ID=RES2360, Owner="Steve Dziaba", Populated=YES, Quantity Override=1, Revision=1, Status="MCL Design", Supplier 1=Digi-Key, Supplier 2=Digi-Key, Supplier Part Number 2=541-2968-1-ND, Symbol=Resistor, Type="RES SMD"
R5 R7 R13 R14 R116: library part RSMT1019, Manufacturer 1=Panasonic, Manufacturer Part Number 1=ERJ-2RKF1002X, Operating Temperature="-55C to +155C", Package=0402, Power=1/10W, Supplier Part Number 1=P10.0KLCT-ND, Temperature Coefficient=100ppm/C, Tolerance=1%, Voltage=50V, Category=Resistor, ComponentLink1Description="SVN Datasheet", ComponentLink1URL=https://chn-vm-apps.microchip.com/mchprepo/parts/Datasheets/AOA0000CE2.pdf, ComponentLink2Description="Local Datasheet", ComponentLink2URL=C:\ALTIUM_WORK\00001_MCHP-CDB\Datasheets\AOA0000CE2.pdf, ComponentLink3Description="Open Symbol", ComponentLink3URL=C:\ALTIUM_WORK\00001_MCHP-CDB\Library\LibraryRefs\Resistor.SchLib, ComponentLink4Description="Open Footprint", ComponentLink4URL=C:\ALTIUM_WORK\00001_MCHP-CDB\Library\Footprints\RES_C_0402.PcbLib, ComponentLink5Description="Open Footprint 2", ComponentLink6Description="Open Footprint 3", ComponentLink7Description="Open Footprint 4", Composition=TKF, Description_="RES TKF 10k 1% 1/10W SMD 0402", Dev Tools Status=Production, MCHP-ID=RSMT1019, Owner="Brent Lanphear", Populated=Yes, Quantity Override=1, Revision=2, Status="MCL Design", Supplier 1=Digi-Key, Symbol=Resistor, Type="RES SMD"
R8: library part RSMT1246, "Resistor", Current=1A, Manufacturer 1="Panasonic Electronic Components", Manufacturer Part Number 1=ERJ-2GE0R00X, Operating Temperature="-55C to +155C", Package=0402, Power=1/10W, Supplier Part Number 1=P0.0JCT-ND, Tolerance=50mOhm, Voltage=50V, Category=Resistor, ComponentLink1Description="SVN Datasheet", ComponentLink1URL=https://chn-vm-apps.microchip.com/mchprepo/parts/Datasheets/DMA0000COL9.pdf, ComponentLink2Description="Local Datasheet", ComponentLink2URL=C:\ALTIUM_WORK\00001_MCHP-CDB\Datasheets\DMA0000COL9.pdf, ComponentLink3Description="Open Symbol", ComponentLink3URL=C:\ALTIUM_WORK\00001_MCHP-CDB\Library\LibraryRefs\Resistor.SchLib, ComponentLink4Description="Open Footprint", ComponentLink4URL=C:\ALTIUM_WORK\00001_MCHP-CDB\Library\Footprints\RES_C_0402.PcbLib, ComponentLink5Description="Open Footprint 2", ComponentLink6Description="Open Footprint 3", ComponentLink7Description="Open Footprint 4", Composition=TKF, Description_="RES TKF 0R 1/10W SMD 0402", Dev Tools Status=Production, MCHP-ID=RSMT1246, Owner="Dragos Danaila", Populated=YES, Quantity Override=1, Revision=1, Status="MCL Design", Supplier 1=Digi-Key, Symbol=Resistor, Type="RES SMD"
R10 R11 R12 R118 R119 R120 R121 R122 R123 R124 R125 R126 R127 R128 R129: library part RSMT1019, Manufacturer 1=Panasonic, Manufacturer Part Number 1=ERJ-2RKF1002X, Operating Temperature="-55C to +155C", Package=0402, Power=1/10W, Supplier Part Number 1=P10.0KLCT-ND, Temperature Coeffcient=100ppm/C, Tolerance=1%, Voltage=50V, Category=Resistor, ComponentLink1Description="SVN Datasheet", ComponentLink1URL=https://chn-vm-apps.microchip.com/mchprepo/parts/Datasheets/AOA0000CE2.pdf, ComponentLink2Description="Local Datasheet", ComponentLink2URL=C:\ALTIUM_WORK\00001_MCHP-CDB\Datasheets\AOA0000CE2.pdf, ComponentLink3Description="Open Symbol", ComponentLink3URL=C:\ALTIUM_WORK\00001_MCHP-CDB\Library\LibraryRefs\Resistor.SchLib, ComponentLink4Description="Open Footprint", ComponentLink4URL=C:\ALTIUM_WORK\00001_MCHP-CDB\Library\Footprints\RES_C_0402.PcbLib, ComponentLink5Description="Open Footprint 2", ComponentLink6Description="Open Footprint 3", ComponentLink7Description="Open Footprint 4", Composition=TKF, Description_="RES TKF 10k 1% 1/10W SMD 0402", Dev Tools Status=Production, MCHP-ID=RSMT1019, Owner="Brent Lanphear", Populated=Yes, Quantity Override=1, Revision=2, Status="MCL Design", Supplier 1=Digi-Key, Symbol=Resistor, Type="RES SMD"
R100 R101 R102: library part RES1462, Manufacturer 1="KOA Speer", Manufacturer Part Number 1=RK73H1ETTP4701F, Operating Temperature="-55C to +155C", Package=0402, Power=1/10W, Supplier Part Number 1=660-RK73H1ETTP4701F, Temperature Coeffcient=100ppm/C, Tolerance=1%, Voltage=50V, Category=Resistor, Circuit Type=Isolated, ComponentLink1Description="SVN Datasheet", ComponentLink1URL=https://chn-vm-apps.microchip.com/mchprepo/parts/Datasheets/RK73H.pdf, ComponentLink2Description="Local Datasheet", ComponentLink2URL=C:\ALTIUM_WORK\00001_MCHP-CDB\Datasheets\RK73H.pdf, ComponentLink3Description="Open Symbol", ComponentLink3URL=C:\ALTIUM_WORK\00001_MCHP-CDB\Library\LibraryRefs\Resistor.SchLib, ComponentLink4Description="Open Footprint", ComponentLink4URL=C:\ALTIUM_WORK\00001_MCHP-CDB\Library\Footprints\RES_C_0402.PcbLib, ComponentLink5Description="Open Footprint 2", ComponentLink6Description="Open Footprint 3", ComponentLink7Description="Open Footprint 4", Composition=TKF, Description_="RES TKF 4.7k 1% 1/10W 0402", Dev Tools Status=Production, MCHP-ID=RES1462, Owner="Stephen Humberd", Populated=YES, Quantity Override=1, Revision=1, Status="MCL Design", Supplier 1=Mouser, Symbol=Resistor, Type="RES SMD"
R107 R108 R109: library part RES1474, Manufacturer 1="Panasonic Electronic Components", Manufacturer Part Number 1=ERJ-2RKF22R0X, Operating Temperature="-55C to +155C", Package=0402, Power=1/10W, Supplier Part Number 1=P22.0LCT-ND, Temperature Coeffcient=100ppm/C, Tolerance=1%, Category=Resistor, Circuit Type=Isolated, ComponentLink1Description="SVN Datasheet", ComponentLink2Description="Local Datasheet", ComponentLink3Description="Open Symbol", ComponentLink3URL=C:\ALTIUM_WORK\00001_MCHP-CDB\Library\LibraryRefs\Resistor.SchLib, ComponentLink4Description="Open Footprint", ComponentLink4URL=C:\ALTIUM_WORK\00001_MCHP-CDB\Library\Footprints\RES_C_0402.PcbLib, ComponentLink5Description="Open Footprint 2", ComponentLink6Description="Open Footprint 3", ComponentLink7Description="Open Footprint 4", Composition=TKF, Description_="RES TKF 22R 1% 1/20W SMD 0402", Dev Tools Status=Production, MCHP-ID=RES1474, Owner="Mike Ragsdale", Populated=YES, Quantity Override=1, Revision=1, Status="MCL Design", Supplier 1=Digi-Key, Symbol=Resistor, Type="RES SMD"
R114: library part RES2767, Manufacturer 1="Panasonic Electronic Components", Manufacturer Part Number 1=ERJ-2RKF1242X, Operating Temperature="-55°C to +155°C", Package=0402, Power=1/10W, Supplier Part Number 1=P12.4KLCT-ND, Temperature Coeffcient=±100ppm/°C, Tolerance=±1%, Voltage=100V, Category=Resistor, ComponentLink1Description="SVN Datasheet", ComponentLink1URL=https://chn-vm-apps.microchip.com/mchprepo/parts/Datasheets/Panasonic_RES_ERJ_Series, ComponentLink2Description="Local Datasheet", ComponentLink2URL=C:\ALTIUM_WORK\00001_MCHP-CDB\Datasheets\Panasonic_RES_ERJ_Series, ComponentLink3Description="Open Symbol", ComponentLink3URL=C:\ALTIUM_WORK\00001_MCHP-CDB\Library\LibraryRefs\Resistor.SchLib, ComponentLink4Description="Open Footprint", ComponentLink4URL=C:\ALTIUM_WORK\00001_MCHP-CDB\Library\Footprints\RES_C_0402.PcbLib, ComponentLink5Description="Open Footprint 2", ComponentLink6Description="Open Footprint 3", ComponentLink7Description="Open Footprint 4", Composition=TKF, Description_="RES TKF 12.4K 1% 1/10W SMD 0402 AEC-Q200", Dev Tools Status=Design, MCHP-ID=RES2767, Owner="Lori Graham", Populated=YES, Quantity Override=1, Revision=1, Status="MCL Design", Supplier 1=Digi-Key, Symbol=Resistor, Type="RES SMD"
R200 R201: library part RES2766, Manufacturer 1="Vishay Dale", Manufacturer Part Number 1=TNPW120649R9BEEA, Operating Temperature="-55°C to +155°C", Package=1206, Power="0.4W, 2/5W", Supplier Part Number 1=TNP49.9ACCT-ND, Temperature Coeffcient=±25ppm/°C, Tolerance=±0.1%, Voltage=200V, Category=Resistor, ComponentLink1Description="SVN Datasheet", ComponentLink1URL=https://chn-vm-apps.microchip.com/mchprepo/parts/Datasheets/tnpw_e3, ComponentLink2Description="Local Datasheet", ComponentLink2URL=C:\ALTIUM_WORK\00001_MCHP-CDB\Datasheets\tnpw_e3, ComponentLink3Description="Open Symbol", ComponentLink3URL=C:\ALTIUM_WORK\00001_MCHP-CDB\Library\LibraryRefs\Resistor.SchLib, ComponentLink4Description="Open Footprint", ComponentLink4URL=C:\ALTIUM_WORK\00001_MCHP-CDB\Library\Footprints\RES_C_1206.PcbLib, ComponentLink5Description="Open Footprint 2", ComponentLink6Description="Open Footprint 3", ComponentLink7Description="Open Footprint 4", Composition=TF, Description_="RES TF 49.9R 0.1% 0.4W SMD 1206 AEC-Q200", Dev Tools Status=Design, MCHP-ID=RES2766, Owner="Lori Graham", Populated=YES, Quantity Override=1, Revision=2, Status="MCL Design", Supplier 1=Digi-Key, Symbol=Resistor, Type="RES SMD"
R202 R203: library part RES2292, Manufacturer 1="Panasonic Electronic Components", Manufacturer Part Number 1=ERJ-8ENF1002V, Operating Temperature="-55°C - 155°C", Package=1206, Power=1/4W, Supplier Part Number 1=P10.0KFCT-ND, Temperature Coeffcient=100ppm/C, Tolerance=1%, Category=Resistor, ComponentLink1Description="SVN Datasheet", ComponentLink1URL=https://chn-vm-apps.microchip.com/mchprepo/parts/Datasheets/AOA0000C304.pdf, ComponentLink2Description="Local Datasheet", ComponentLink2URL=C:\ALTIUM_WORK\00001_MCHP-CDB\Datasheets\AOA0000C304.pdf, ComponentLink3Description="Open Symbol", ComponentLink3URL=C:\ALTIUM_WORK\00001_MCHP-CDB\Library\LibraryRefs\Resistor.SchLib, ComponentLink4Description="Open Footprint", ComponentLink4URL=C:\ALTIUM_WORK\00001_MCHP-CDB\Library\Footprints\RES_C_1206.PcbLib, ComponentLink5Description="Open Footprint 2", ComponentLink6Description="Open Footprint 3", ComponentLink7Description="Open Footprint 4", Composition=TKF, Description_="RES TKF 10k 1% 1/4W SMD 1206 AEC-Q200", Dev Tools Status=Design, MCHP-ID=RES2292, Owner="Gabor Bihari", Populated=YES, Quantity Override=1, Revision=A, Status="MCL Design", Supplier 1=Digi-Key, Symbol=Resistor, Type="RES SMD"
TP1 TP2 TP3 TP4 TP5 TP6: library part AIS-CON0024, "Test Point", Category=Connector, Description_="TP Pad PCB round 0.5mm SMD", MCHP-ID=AIS-CON0024, Owner="JBU  (M21065)", Populated=Yes, Quantity Override=1, Revision=1, Type="Test Point"
U100: library part AIS-IC0371, Manufacturer 1=Microchip, Manufacturer Part Number 1=LAN8670C2, Package=VQFN-32, Category=IC, Description_="​10BASE-T1S Ethernet PHY 5x5 Package VQFN-32 REV C2", MCHP-ID=AIS-IC0371, Owner=JBU(M21065), Populated=Yes, Quantity Override=1, Revision=1, Status=Production, Supplier 1=Microchip, Supplier Part Number 1=LAN8670C2, Type="Ethernet PHY"
LABEL1: MCHP-ID=08-10021

## Free pads (board coordinates)
  round 1.3 smd: 1(2,29.5) 1(18,2.3)
  round 1.3 smd far side: 1(2,29.5) 1(18,2.3)

## Via types
v1: diameter 0.6, hole 0.3, Top Layer to Bottom Layer, tented both sides, 98 vias
v2: diameter 0.5, hole 0.3, Top Layer to Bottom Layer, tented both sides, 30 vias
v3: diameter 0.8, hole 0.4, Top Layer to Bottom Layer, tented both sides, 3 vias
v4: diameter 0.6, hole 0.3, Top Layer to Bottom Layer, tented top, 1 vias

## Nets (pads, with @x,y where several pads share a name; then routed paths per layer and width w, separated by ;. In a path a pad name is that pad's centre, name@x,y a point inside that pad or via, vN(x,y) a via of type N, cw(c..) or ccw(c..) an arc to the next point about the centre after c; other vN are vias at no path point)
3V3: C100.2 C101.2 C102.2 C103.2 C104.2 J3.10 L101.2 R4.1 R100.2 R101.2 R102.2 R116.2 R119.2 R121.2 R123.2 R125.2 R127.2 U100.8 U100.18 | length 16.2
  Top Layer w0.2: v1(7.85,7.167) 7.892,7.208 8.608,7.208 U100.8@8.65,7.25 ; U100.18@13.55,7.75 13.575,7.725 v1(14.375,7.725)
  Top Layer w0.25: R119.2@14.525,12.1 14.556,12.131 14.556,12.653 v2(14.588,12.684) ; v2(15.104,6.5) R123.2@15.775,6.5 ; R101.2@18.525,7.34 18.557,7.34 19.006,7.789 v2(19.025,7.789) ; R121.2@18.775,15.475 18.775,15.887
  Top Layer w0.508: J3.10@2.61,3.87 2.659,3.821 3.751,3.821 4.148,3.425 R4.1@4.198,3.425
  Bottom Layer w0.2: C104.2@13.9,7.2 14.375,7.675 v1(14.375,7.725) 14.425,7.725 C103.2@13.9,8.25
  Bottom Layer w0.25: v1(7.85,7.167) 7.933,7.167 C100.2@8.35,6.75 ; v1@7.95,7.35 C101.2@8.35,7.75 ; v2(15.104,6.5) 15.122,6.518 15.122,7.141 R102.2@15.14,7.16 ; R125.2@17.674,9.562 v2(18.417,9.562) ; R127.2@18.5,15.522 18.5,15.92 18.621,16.041 v2(18.621,16.136) ; R100.2@18.525,7.34 18.557,7.34 19.006,7.789 v2(19.025,7.789)
  Bottom Layer w0.3: v1(7.592,5.463) 7.649,5.405 7.649,5.288 8.175,4.762 R116.2@8.175,4.468
  Bottom Layer w0.5: v1(7.592,5.463) 7.619,5.463 7.734,5.578 8.428,5.578 C102.2@8.5,5.65
  Bottom Layer w0.8: L101.2@7.775,9.7 7.775,7.442 7.95,7.267 v1(7.85,7.167)
ACMA: J3.11 R8.1 | length 5.3
  Top Layer w0.2: v2(5.831,2.6) R8.1@7.9,2.6
  Bottom Layer w0.2: J3.11@2.61,2.6 v2(5.831,2.6)
CLK50M: J3.8 U100.27 | length 14.1
  Top Layer w0.2: v1(11.287,13.011) 11.85,12.448 U100.27@11.85,11.45
  Bottom Layer w0.2: J3.8@2.61,6.41 2.718,6.518 3.367,6.518 6.5,9.65 6.5,11.163 7.896,12.559 10.091,12.559 10.543,13.011 v1(11.287,13.011)
CRSDV: J4.6 R125.1 R126.1 U100.20 | length 14.1
  Top Layer w0.2: U100.20@13.55,8.75 v2(15.65,8.75)
  Bottom Layer w0.2: v2(15.65,8.75) 16.65,8.75 16.767,8.867 16.767,9.562 16.767,12.776 17.291,13.3 17.871,13.3 18.417,12.754 18.417,10.618 20.085,8.95 J4.6@20.39,8.95
ETRX_N: C200.2 J6.2 MOV201.2 R200.2 R203.1 | length 7.7
  Top Layer w0.5: C200.2@10.675,22.802 v1(10.675,23.385)
  Bottom Layer w0.5: J6.2@9.75,28.6 9.54,28.39 9.54,25.815 10.419,24.936 R203.1@10.419,24.561 10.656,24.324 10.656,23.404 v1(10.675,23.385) 10.656,23.366 10.656,22.372 R200.2@10.419,22.135
ETRX_P: C201.2 J6.1 MOV202.2 R201.2 R202.1 | length 7.7
  Top Layer w0.5: C201.2@12.325,22.798 v1(12.325,23.375)
  Bottom Layer w0.5: R201.2@12.581,22.135 12.344,22.372 12.344,23.356 v1(12.325,23.375) 12.344,23.394 12.344,24.324 12.831,24.811 12.831,25.255 13.184,25.609 13.184,25.664 13.485,25.965 13.485,28.365 J6.1@13.25,28.6
GND: C1.1 C100.1 C101.1 C102.1 C103.1 C104.1 C105.1 C106.1 C107.1 C108.1 C109.1 J1.1 J1.2 J1.3 J2.1 J2.2 J2.3 J3.6 J3.9 J7.1 J8.1 MOV201.1 MOV202.1 R5.1 R7.1 R10.1 R12.1 R13.1 R14.1 R114.1 R118.2 R120.2 R122.2 R124.2 R126.2 R128.2 R129.1 R202.2 R203.2 U100.3 U100.4 U100.33 | length 104.4
  Top Layer w0.2: v2(15.425,12.725) 15.427,12.723 15.427,12.102 R118.2@15.43,12.1 ; R124.2@16.675,6.5 16.769,6.594 16.769,7.033 v2(16.846,7.11) ; R122.2@17.8,15.475 v2(17.8,16.136)
  Top Layer w0.25: U100.4@8.65,9.25 9.85,9.25 v2(10.1,9) ; U100.3@8.65,9.75 9.85,9.75 v2(10.1,10) ; R12.1@20.84,17.55 20.855,17.566 21.52,17.566 v4(21.536,17.581)
  Top Layer w0.3: v1(7.05,6.15) R129.1@7.05,6.75
  Top Layer w0.508: v1(7.25,4.576) R7.1@7.926,4.576 ; v1(8.051,13.391) 8.059,13.383 8.059,12.768 R5.1@8.068,12.759 ; R114.1@13.25,13.2 14.108,13.2 v1(14.525,13.617)
  GND w0.2: v1(0.7,0.7) 0.792,0.7 1.017,0.475 4.283,0.475 4.508,0.7 v1(4.6,0.7) v1(6.5,0.7) v1(8.5,0.7) v1(14.5,0.7) v1(16.5,0.7) v1@18.3,0.7 ; v1(0.7,4.7) v1(0.7,6.7) v1(0.7,8.7) v1(0.7,10.7) v1(0.7,12.7) v1(0.7,14.7) v1(0.7,16.7) v1(0.7,20.7) v1(0.7,22.7) v1(0.7,24.7) v1(0.7,26.7) v1(0.7,28.7) v1(0.7,30.3) 1.2,30.8 v1(1.5,30.8) v1(3.525,30.8) ; J1.3@2.05,21.65 J1.3@2.6,21.65 ; J3.9@2.61,5.14 J3.9@3.1,5.14 ; v1@22.135,0.535 v1(22.3,0.7) v1(22.3,2.7) v1(22.3,4.7) v1(22.3,6.7) v1(22.3,8.7) v1(22.3,10.7) v1(22.3,12.7) v1(22.3,14.7) v1(22.3,16.7) v1(22.3,20.7) v1(22.3,22.7) v1(22.3,24.7) v1(22.3,26.7) v1(22.3,28.7) v1(22.3,30.3)
  Bottom Layer w0.2: J1.3@2.55,21.6 J1.3@2.6,21.65 J1.1@2.6,24.19 ; C102.1@10.1,5.65 10.1,6.75 C100.1@9.25,6.75 C101.1@9.25,7.75 9.85,7.75 v2(10.1,8) ; v2(10.1,10) 10.4,10.3 C106.1@10.4,10.85 ; v2(11.1,10) 11.4,10.3 C105.1@11.4,10.85 ; v2(12.1,8) 12.35,8.25 C103.1@13,8.25 C104.1@13,7.2 ; v2@12.15,10.05 v2(12.1,10) 12.1,10.55 C108.1@12.4,10.85 C109.1@13.4,10.85 ; R128.2@17.638,15.475 17.638,15.865 17.8,16.027 v2(17.8,16.136) ; R126.2@17.674,8.75 17.686,8.763 18.319,8.763 v2(18.332,8.775) ; 20.39,21.01 J2.3@20.39,21.65 J2.2@20.39,22.92 J2.1@20.39,24.19
  Bottom Layer w0.35: C107.1@9.075,10.075 C107.1@9.075,10.15
  Bottom Layer w0.508: C1.1@13.505,15.025 v3(14.303,15.025)
  other v1: 10.5,0.7 12.5,0.7 18.5,0.7 0.7,2.7 4.576,11.854 6.326,12.554 9.164,16.61 3.469,17.025 6.761,18.48 18.114,18.675 0.7,18.7 22.1,18.7 14.876,18.8 20.126,18.976 21.027,19.9 2.6,20.025 9.419,20.075 13.575,20.225 6.728,20.965 16.433,21.115 4.088,21.175 16.476,23.148 6.522,23.17 18.403,25.33 4.359,25.45 16.074,26 21.027,26 6.818,26.021 2.225,26.7 7.361,26.995 15.62,26.995 7.361,27.991 15.62,28.004 20.918,28.725 15.62,29.02 7.361,29.049 19.525,30.8 21.5,30.8 7.361,31.2 9.017,31.2 10.609,31.2 12.2,31.2 13.792,31.2 15.616,31.2
  other v2: 9.775,1.035 10.599,5.365 11.1,8 11.1,9 12.1,9 16.074,10.483 17.1,13.917
GPIO0: J3.12 R6.1 | length 6.2
  Top Layer w0.2: J3.12@2.61,1.33 3.724,1.33 5.955,3.561 R6.1@7.926,3.561
INH: R1.2 R12.2 TP1.1 U100.1 | length 19.3
  Top Layer w0.2: v1(7.219,12.7) 7.219,12.63 7.709,12.14 7.709,11.231 8.19,10.75 U100.1@8.65,10.75 ; v1(18.994,17.405) 19.102,17.405 19.19,17.493 R12.2@19.89,17.493 ; R1.2@19.935,16.7 R12.2@19.935,17.329
  Top Layer w0.25: TP1.1@18.273,17.429 18.285,17.417 18.982,17.417 v1(18.994,17.405)
  Bottom Layer w0.2: v1(7.219,12.7) 7.187,12.733 7.187,13.4 10.195,16.408 15.934,16.408 16.931,17.405 v1(18.994,17.405)
MDC: J4.7 R100.1 U100.13 | length 12.7